# Allegro board pc042b_vsupply5v_03.brd
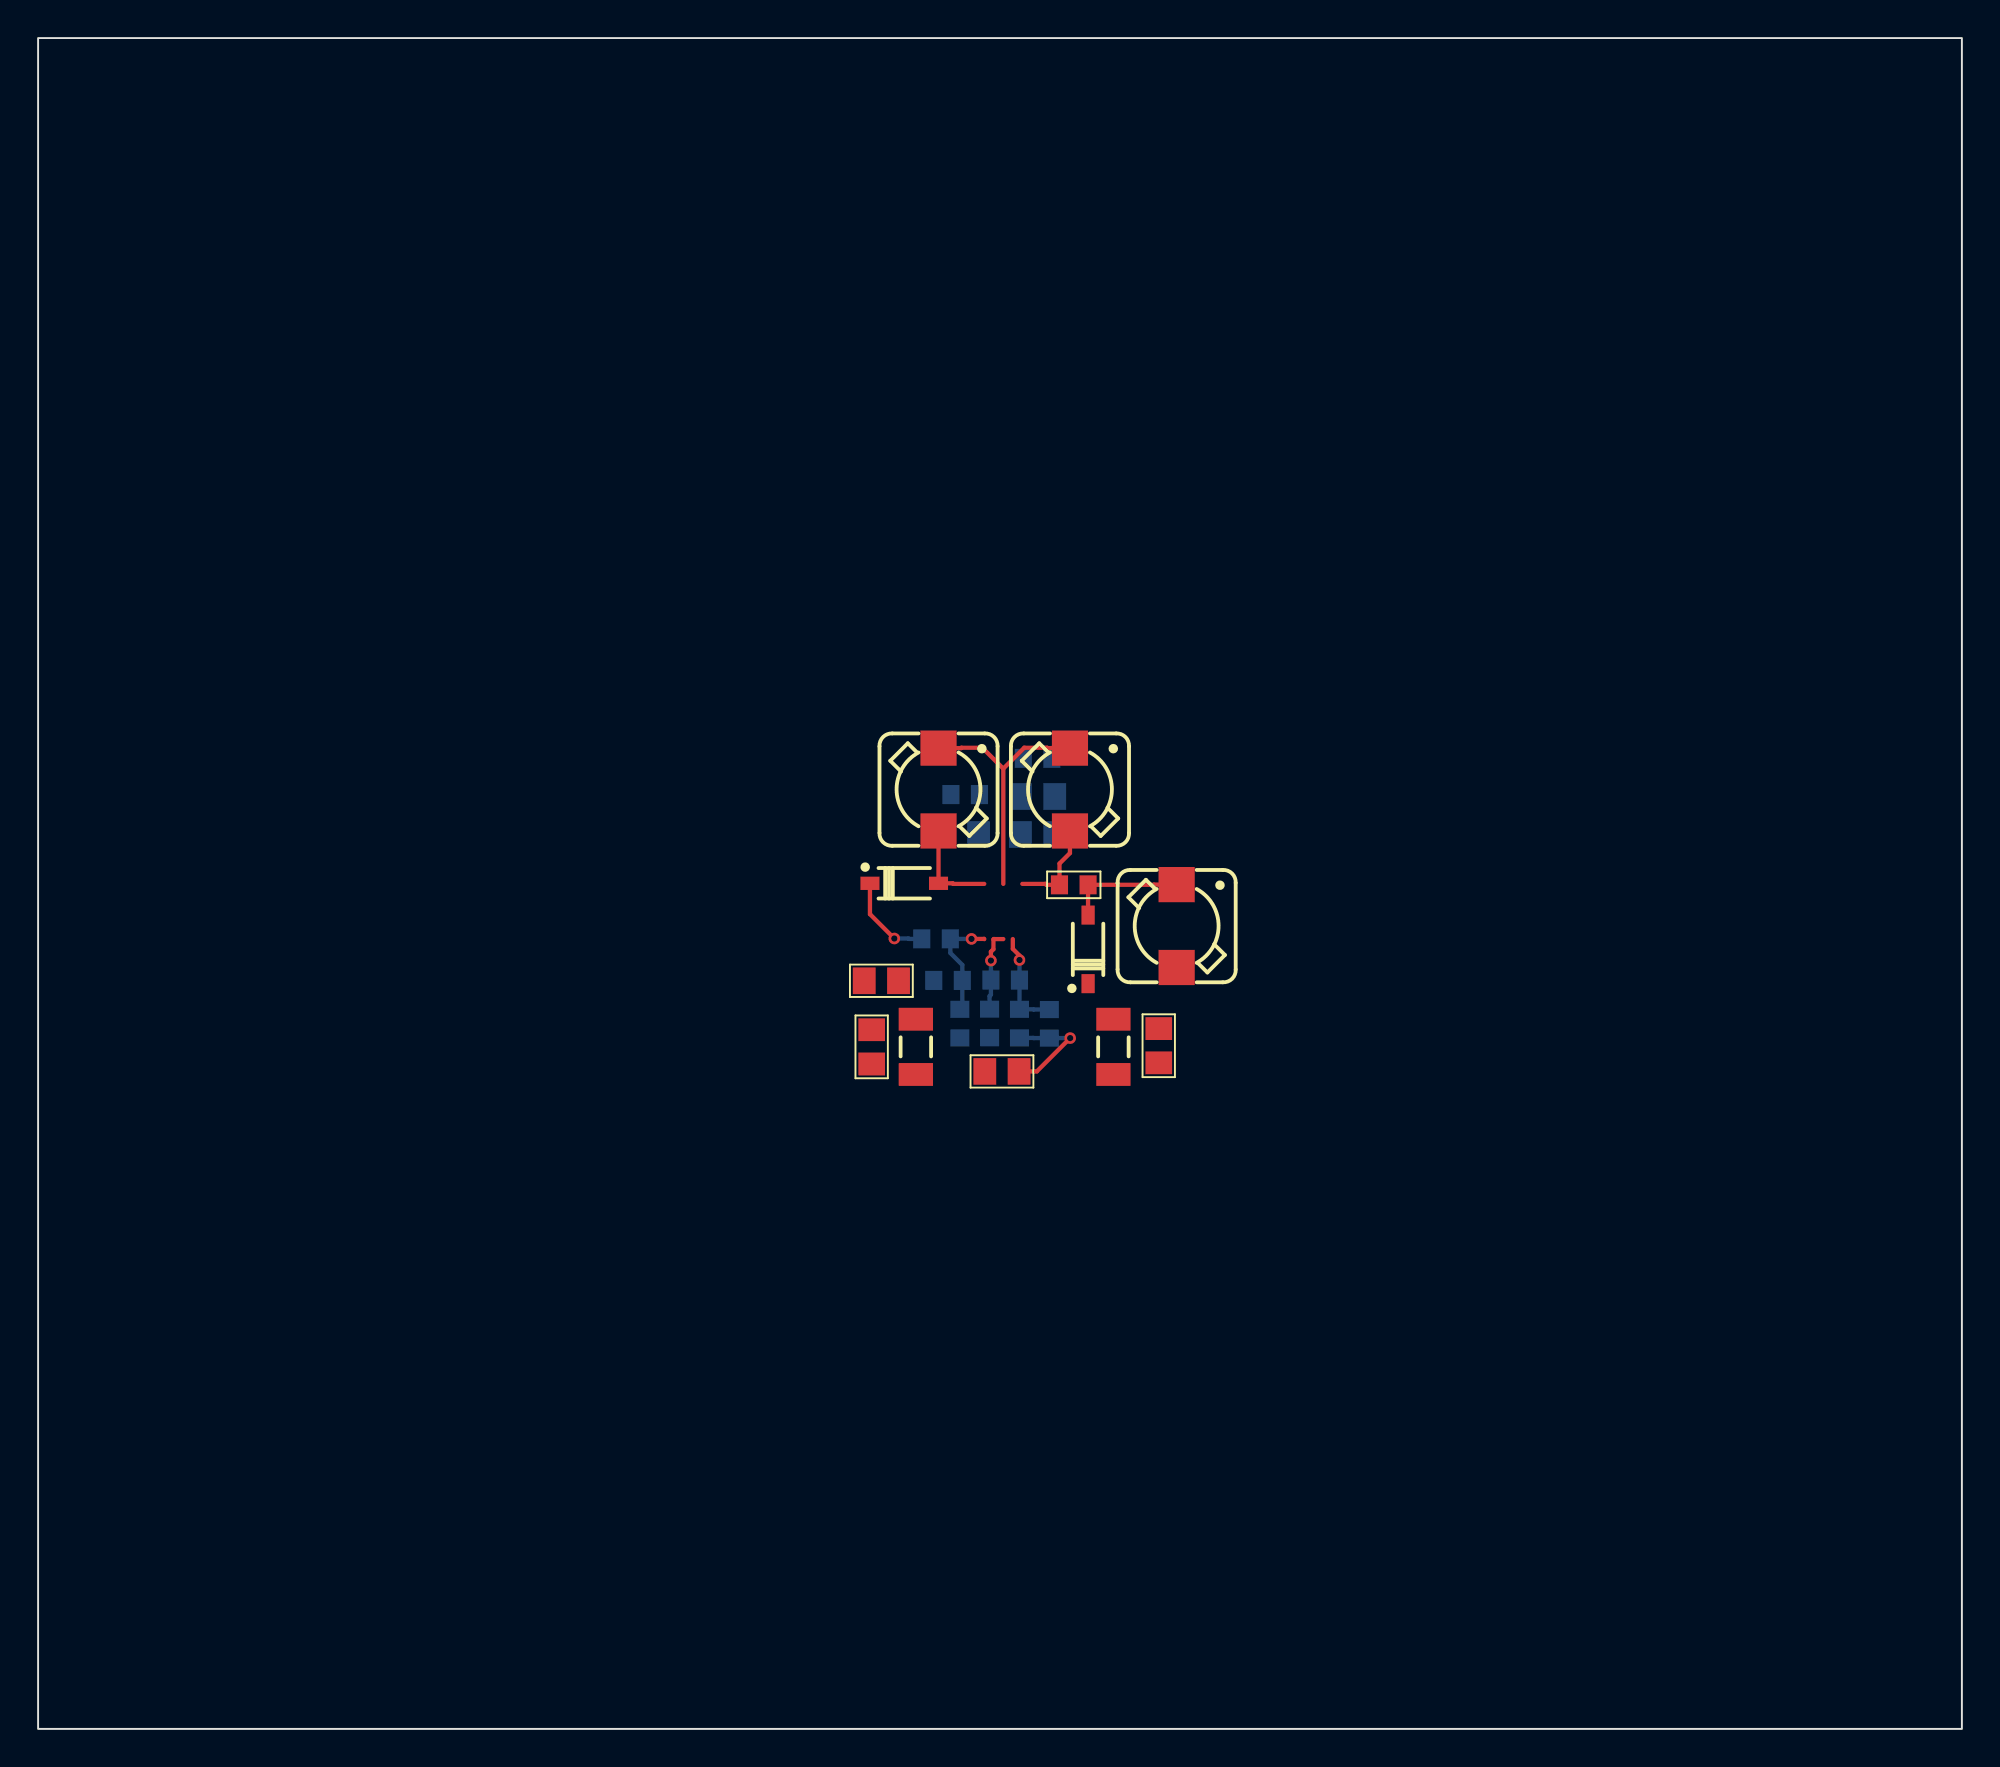
[diagram p0: board, top side]
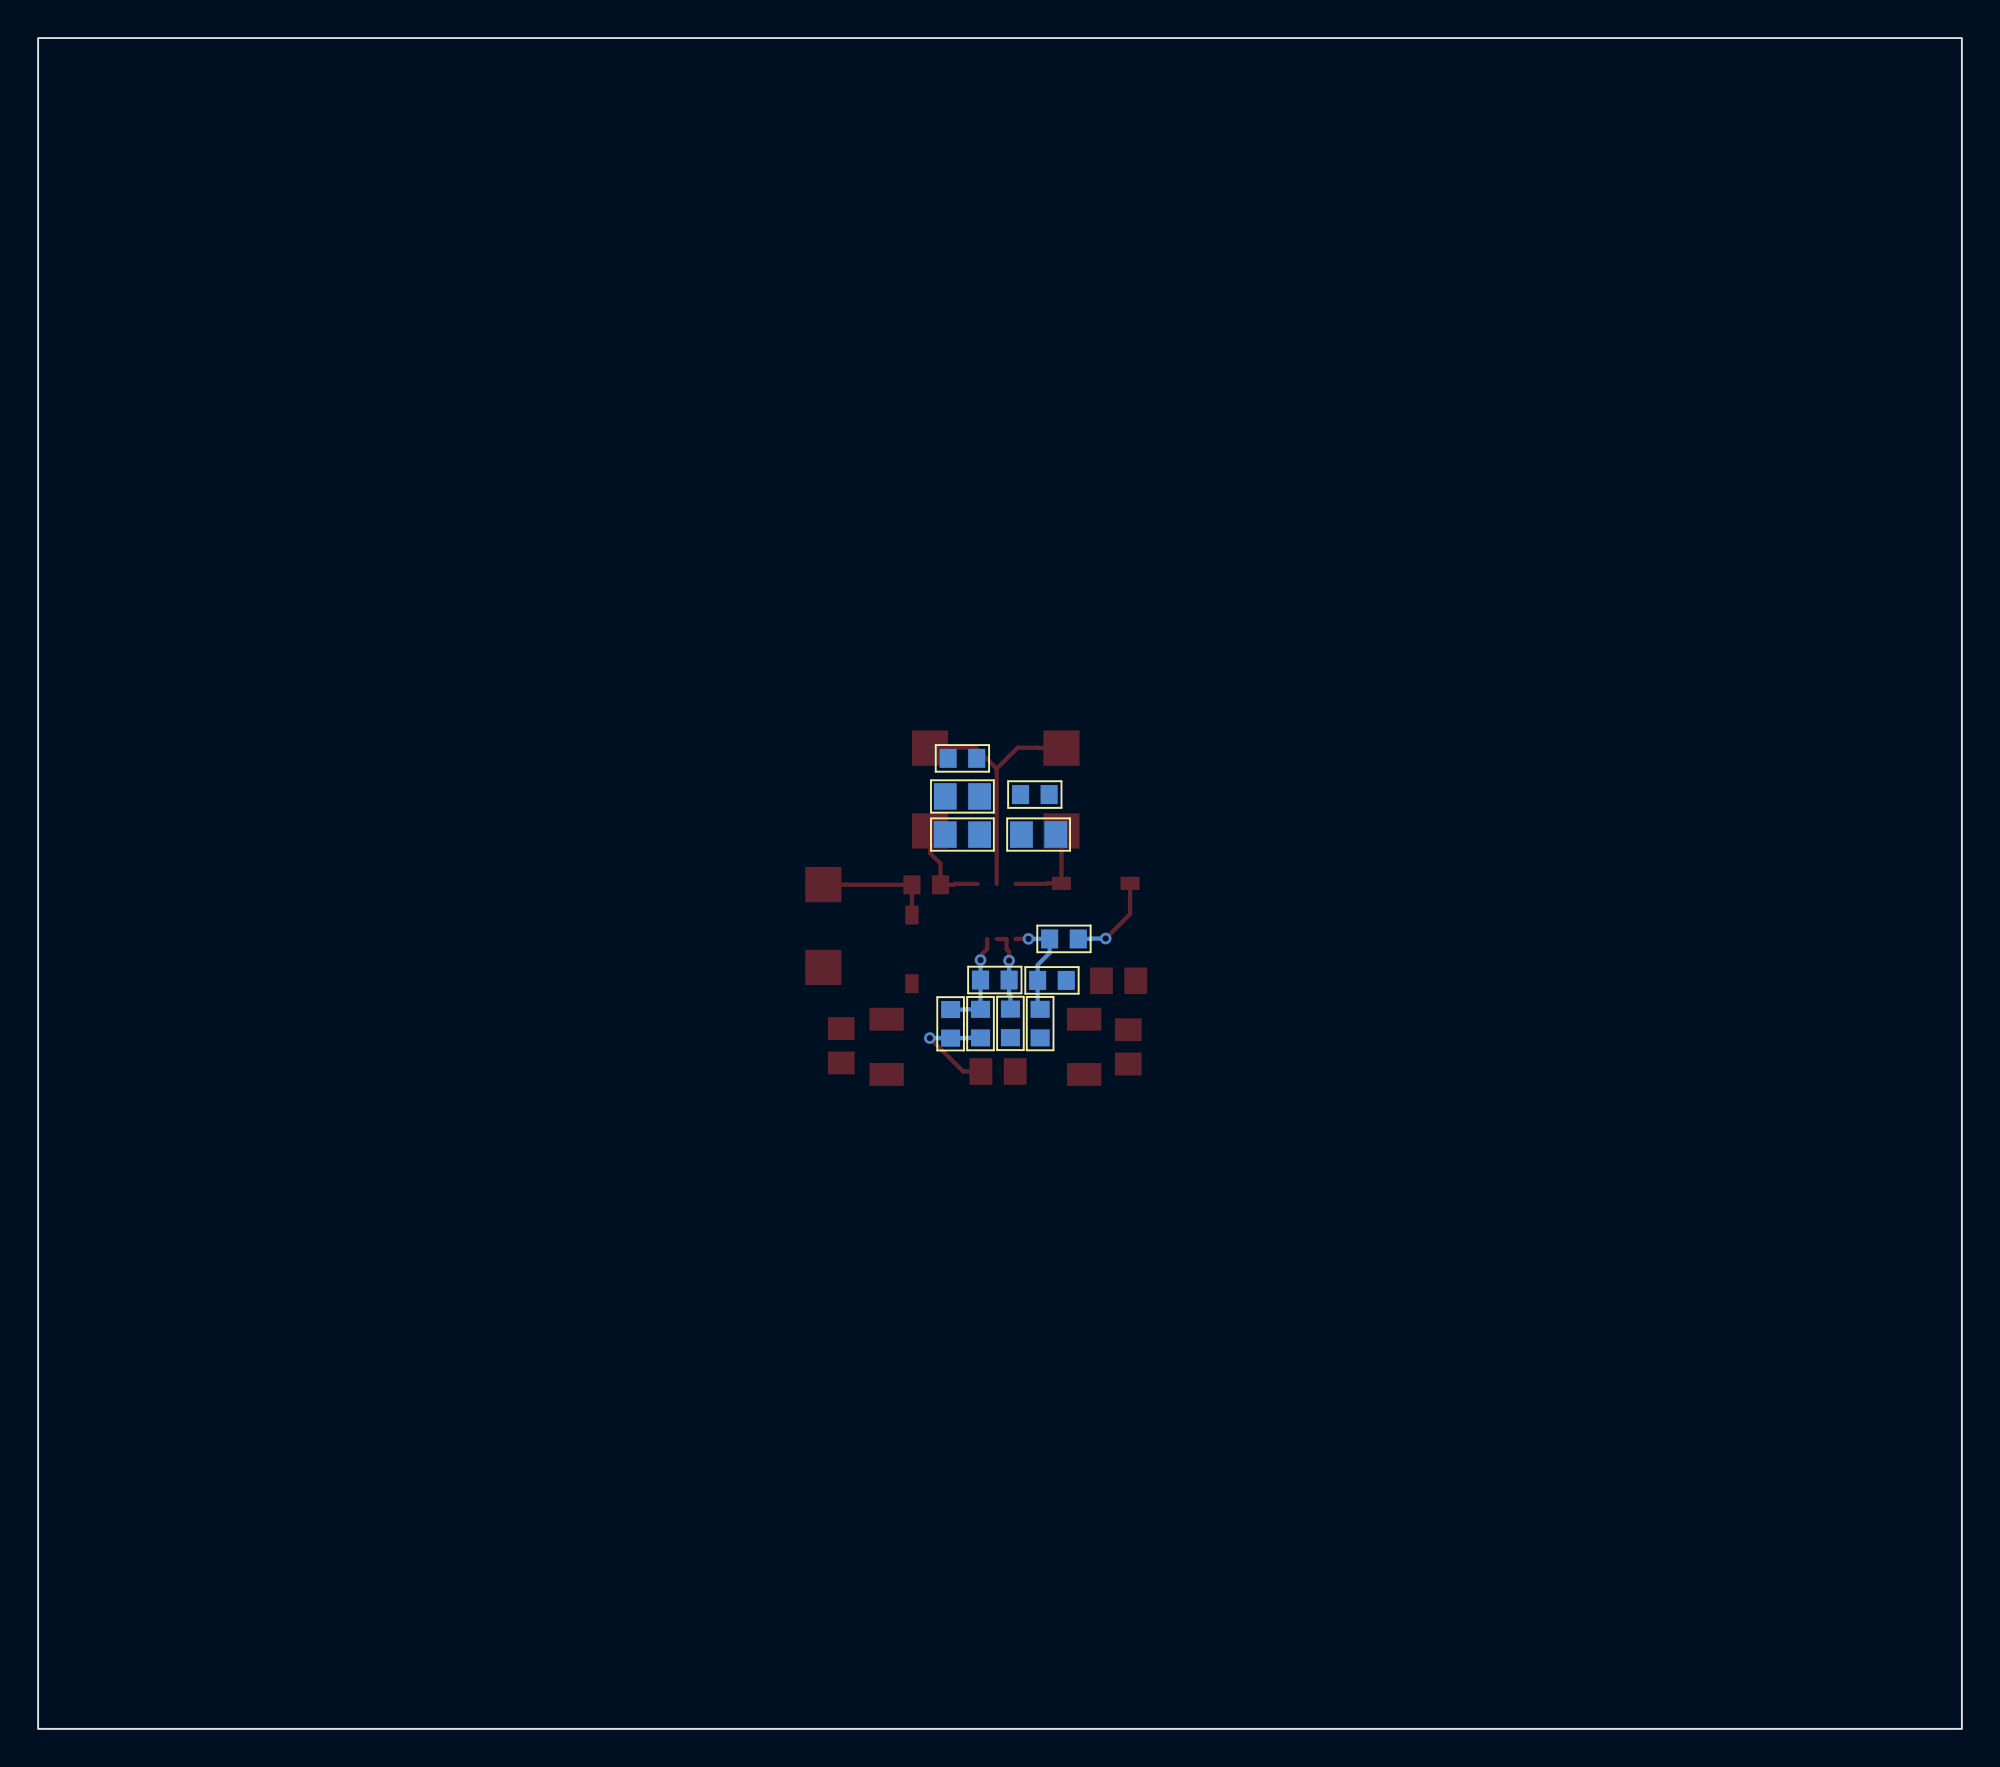
[diagram p1: board, bottom side, seen from below]

Outline 100.99 x 88.8 mm; copper layers: TOP, L2, L3, L4, L5, BOTTOM. Coordinates in mm from the lower left corner of the outline.
Outline path: rectangle 0,0 100.99,88.8

## Placement (name value [footprint] x y rotation side)
C1  4.7uF  [C0805]  52.47 48.97 180 bottom
C2  330nF  [C0805]  48.47 46.97 180 bottom
C3  330nF  [C0805]  52.47 46.97 0 bottom
C4  100nF  [C0603]  49.95 37.05 90 bottom
C5  1uF  [C0603]  54.37 44.33 0 top
C6  33pF  [C0603]  47.14 41.49 0 bottom
C7  10uF  [C0805]  50.6 34.53 0 top
C8  4.7uF  [C0805]  44.27 39.29 0 top
C9  68pF  [C0603]  53.09 37.03 90 bottom
C10  4.7uF  [C0805]  43.76 35.82 270 top
C11  4.7uF  [C0805]  58.83 35.88 270 top
D1  -  [SOD3715X145N]  45.47 44.41 0 top
D2  -  [SOD3715X145N]  55.12 40.94 90 top
L1  10uH  [IND_WURTH_XS]  47.27 49.33 270 top
L2  10uH  [IND_WURTH_XS]  54.17 49.33 270 top
L3  10uH  [IND_WURTH_XS]  59.77 42.16 270 top
L4  -  [INDC3216X130N]  46.08 35.82 270 top
L5  -  [INDC3216X130N]  56.45 35.82 270 top
NOREF  -  []  -47.45 -107.93 0 top
R1  4.7k  [C0603]  52.47 50.97 0 bottom
R2  4.7k  [C0603]  48.67 49.07 180 bottom
R3  20k  [C0603]  50.77 39.33 180 bottom
R4  110k  [C0603]  51.52 37.04 90 bottom
R5  90k9  [C0603]  48.39 37.04 90 bottom
R6  20k  [C0603]  47.77 39.31 0 bottom

## Library data of the parts
C1 C8 C10 C11 = CAPCERSMDCL2: part number: CAPCERSMDCL2_0805-4.7UF,10V; tolerance: +80%-20%
C2 C3 = CAPCERSMDCL2: part number: CAPCERSMDCL2_0805-330NF,50V; tolerance: 10%
C4 = CAPCERSMDCL2: part number: CAPCERSMDCL2_0603-100NF,16V; tolerance: 10%
C5 = CAPCERSMDCL2: part number: CAPCERSMDCL2_0603-1UF,16V; tolerance: 10%
C6 = CAPCERSMDCL1: part number: CAPCERSMDCL1_0603-33PF,50V; tolerance: 5%
C7 = CAPCERSMDCL2: part number: CAPCERSMDCL2_0805-10UF,10V_GEN; tolerance: 10%
C9 = CAPCERSMDCL1: part number: CAPCERSMDCL1_0603-68PF,50V; tolerance: 5%
D1 D2 = DIODE: part number: DIODE_SCHOTTKY_CA-SD101AW
L1-L3 = INDUCTANCE: part number: INDUCTANCE_XS-10UH_25%
L4 L5 = FERRITE: part number: FERRITE_SMD-7427921,WURTH
R1 R2 = RSMD0603: part number: RSMD0603_1/16W-4K7,5%; tolerance: 5%
R3 R6 = RSMD0603: part number: RSMD0603_1/16W-20K,1%; tolerance: 1%
R4 = RSMD0603: part number: RSMD0603_100MW-110K,0.1%; tolerance: 0.1%
R5 = RSMD0603: part number: RSMD0603_1/16W-90K9,1%; tolerance: 1%

## Footprints (pads in the part's own frame, mm; a bottom-side part is the same pattern mirrored in y, then rotated)
C0603
  rect 0.9x1 smd: 1(-0.75,0) 2(0.75,0)
C0805
  rect 1.2x1.4 smd: 1(-0.9,0) 2(0.9,0)
IND_WURTH_XS
  rect 1.85x1.9 smd: 1(-2.18,0) 2(2.17,0)
INDC3216X130N
  rect 1.2x1.8 smd: 1(-1.45,0) 2(1.45,0)
SOD3715X145N
  rect 1x0.7 smd: A(1.8,0) C(-1.8,0)

## Nets
GND_SIGNAL: C1.1(A<0>) C2.1(A<0>) C3.1(A<0>) C4.1(A<0>) C7.1(A<0>) C8.1(A<0>) C10.1(A<0>) C11.1(A<0>) D2.C(K<0>) R6.1(A<0>)
VIN: C1.2(B<0>) L1.1(A<0>) L2.1(A<0>) R1.1(A<0>) R2.1(A<0>)
+VOUT: C10.2(B<0>) L4.2(B)
-VOUT: C11.2(B<0>) L5.2(B)
UNNAMED_1_CAPCERSMDCL1_I12_B: C6.2(B<0>) R5.2(B<0>) R6.2(B<0>)
UNNAMED_1_CAPCERSMDCL1_I13_B: C9.2(B<0>) R3.1(A<0>) R4.2(B<0>)
UNNAMED_1_CAPCERSMDCL2_I9_B: C2.2(B<0>) R2.2(B<0>)
UNNAMED_1_CAPCERSMDCL2_I10_B: C3.2(B<0>) R1.2(B<0>)
UNNAMED_1_CAPCERSMDCL2_I11_A: C5.1(A<0>) L2.2(B<0>)
UNNAMED_1_CAPCERSMDCL2_I11_B: C5.2(B<0>) D2.A(A<0>) L3.1(A<0>)
UNNAMED_1_CAPCERSMDCL2_I15_B: C6.1(A<0>) C8.2(B<0>) D1.C(K<0>) L4.1(A) R5.1(A<0>)
UNNAMED_1_CAPCERSMDCL2_I17_B: C4.2(B<0>) R3.2(B<0>)
UNNAMED_1_CAPCERSMDCL2_I20_B: C7.2(B<0>) C9.1(A<0>) L3.2(B<0>) L5.1(A) R4.1(A<0>)
UNNAMED_1_DIODE_I48_A: D1.A(A<0>) L1.2(B<0>)

## Via types
v1: diameter 0.61, hole 0.33, TOP to BOTTOM, 5 vias

## Routing (per net, layer and track width the routed paths; a pad name or vN(x,y) marks a point on that pad's centre or on a via; arc(x,y) is an arc through that point)
VIN: length 13.9
  TOP w0.226: L2.1 52.98,51.51 52.96,51.53 51.77,51.53 50.67,50.43 ; L1.1 48.46,51.51 48.48,51.53 49.57,51.53 50.67,50.43 ; 50.67,50.43 50.67,44.38
UNNAMED_1_CAPCERSMDCL1_I12_B: length 5.8
  TOP w0.226: v1(49,41.49) 49.66,41.49 49.67,41.48
  BOTTOM w0.226: v1(49,41.49) C6.2 47.89,40.75 48.52,40.12 R6.2 48.52,37.92 R5.2
UNNAMED_1_CAPCERSMDCL1_I13_B: length 5.4
  TOP w0.226: 51.17,41.48 51.17,40.96 51.52,40.61 v1(51.52,40.38)
  BOTTOM w0.226: v1(51.52,40.38) R3.1 R4.2 52.26,37.79 52.27,37.78 C9.2
UNNAMED_1_CAPCERSMDCL2_I11_A: length 5
  TOP w0.226: L2.2 54.17,45.99 53.62,45.44 C5.1 52.93,44.33 52.88,44.38 51.67,44.38
UNNAMED_1_CAPCERSMDCL2_I11_B: length 6.2
  TOP w0.226: D2.A C5.2 58.57,44.33 58.58,44.34 L3.1
UNNAMED_1_CAPCERSMDCL2_I15_B: length 4.9
  TOP w0.226: D1.C 43.67,42.79 v1(44.95,41.51)
  BOTTOM w0.226: C6.1 45.7,41.49 45.68,41.51 v1(44.95,41.51)
UNNAMED_1_CAPCERSMDCL2_I17_B: length 4.3
  TOP w0.226: v1(50.02,40.35) 50.02,40.81 50.15,40.95 50.15,41.46 50.17,41.48 50.67,41.48
  BOTTOM w0.226: C4.2 49.95,38.49 50.02,38.56 R3.2 v1(50.02,40.35)
UNNAMED_1_CAPCERSMDCL2_I20_B: length 6.1
  TOP w0.226: C7.2 52.43,34.53 v1(54.18,36.28)
  BOTTOM w0.226: v1(54.18,36.28) C9.1 52.27,36.28 52.26,36.29 R4.1
UNNAMED_1_DIODE_I48_A: length 5.2
  TOP w0.226: 49.67,44.38 48.04,44.38 48.01,44.41 D1.A L1.2

## Text on the board
PAGE_OUTLINE: D.Cussans | S.Nash | 3.3V --> +/- 5V DC-DC supply | PC042b_vsupply5v | 1/1
